# EAGLE board Amplifier (EAGLE 6.2)
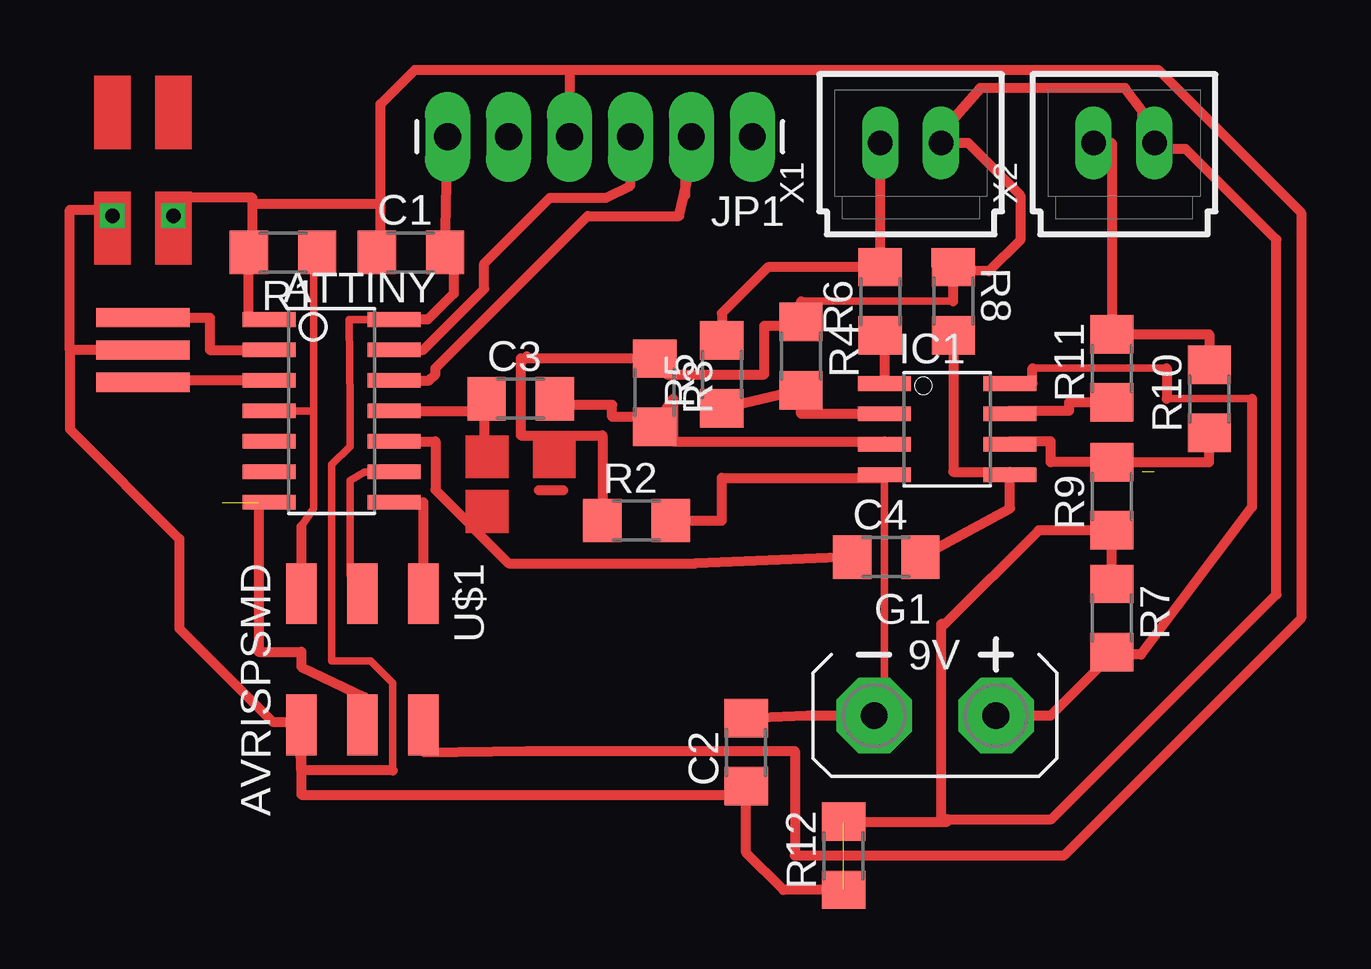
[diagram p0: board, top side]

No outline drawn. Coordinates in mm, seen from the top.
Copper layers (1*16): Top 0.035mm / dielectric 1.5mm / Bottom 0.035mm
Design rules: minimum track width 10mil, minimum drill 24mil, track to track 8mil, track to pad 8mil, pad to pad 8mil, via to via 8mil, smd to smd 8mil, copper to edge 40mil, drill to drill 8mil, minimum pad ring 10mil, minimum via ring 8mil, stop-mask expansion 4mil, vias tented up to drill 0mil, thermal gap 10mil

## Footprints (pad centres in the part's own frame; a part is rotated, then mirrored left to right if it is on the bottom)
SOIC14 = smd 0.61 x 2.21: 1 -3.81,-2.603; 2 -2.54,-2.603; 3 -1.27,-2.603; 4 0,-2.603; 5 1.27,-2.603; 6 2.54,-2.603; 7 3.81,-2.603; 8 3.81,2.603; 9 2.54,2.603; 10 1.27,2.603; 11 0,2.603; 12 -1.27,2.603; 13 -2.54,2.603; 14 -3.81,2.603
1206 = smd 1.6 x 1.803: 1 -1.422,0; 2 1.422,0
AB9V = drill 1.118 pad 3.15 octagon: + 0,2.54; - 0,-2.54
SO08 = smd 0.61 x 2.21: 1 -1.905,-2.616; 2 -0.635,-2.616; 3 0.635,-2.616; 4 1.905,-2.616; 5 1.905,2.616; 6 0.635,2.616; 7 -0.635,2.616; 8 -1.905,2.616
1X06_LONGPADS = drill 1.118 pad 1.88 long: 1 0,0; 2 2.54,0; 3 5.08,0; 4 7.62,0; 5 10.16,0; 6 12.7,0
EFOBM = smd 0.8 x 3.9: 1 -1.35,0; 2 0,0; 3 1.35,0
2X03SMD = smd 2.54 x 1.27: 1 -2.54,2.54; 2 2.92,2.54; 3 -2.54,0; 4 2.92,0; 5 -2.54,-2.54; 6 2.92,-2.54
70543-02 = drill 1.016 long: 1 -1.27,0; 2 1.27,0

## Placement (x,y rotation side)
ATTINY  ATTINY44-SSU  [SOIC14]  40.64,27.94 270 top
C1  [1206]  43.94,34.54 0 top
C2  220  [1206]  57.91,13.72 90 top
C3  .1uF  [1206]  48.51,28.45 0 top
C4  .1uF  [1206]  63.75,21.84 0 top
G1  AB9V  [AB9V]  65.79,15.24 270 top
IC1  OPA2132U  [SO08]  66.29,27.18 270 top
JP1  [1X06_LONGPADS]  58.17,39.37 180 top
QUARTZ  RESONATOR  [EFOBM]  32.77,30.48 90 top
R1  [1206]  38.61,34.54 180 top
R2  4.7K  [1206]  53.34,23.37 0 top
R3  100K  [1206]  54.1,28.7 270 top
R4  1K  [1206]  60.2,30.23 270 top
R5  10k  [1206]  56.9,29.46 90 top
R6  0  [1206]  63.5,32.51 90 top
R7  4.7K  [1206]  73.15,19.3 270 top
R8  100K  [1206]  66.55,32.51 270.1 top
R9  1K  [1206]  73.15,24.38 90 top
R10  10k  [1206]  77.22,28.45 90 top
R11  0  [1206]  73.15,29.72 90 top
R12  0  [1206]  61.98,9.4 90 top
U$1  AVRISPSMD  [2X03SMD]  41.91,17.78 270 top
X1  C-GRID-02-70543  [70543-02]  64.77,39.12 0 top
X2  C-GRID-02-70543  [70543-02]  73.66,39.12 0 top

## Library data of the parts
ATTINY QUARTZ U$1 = fab
C1-C4 = FAB_Hello
G1 = battery
IC1 = burr-brown; MF: TEXAS INSTRUMENTS; MPN: OPA2132U; OC_FARNELL: 1206934; OC_NEWARK: 80K6015
JP1 = SparkFun-Connectors
R1-R12 = ng
X1 X2 = con-molex; OC_FARNELL: unknown; OC_NEWARK: unknown

## Nets
9V+: G1.+ IC1.8 R7.2
9V-: C2.2 G1.- IC1.4 R2.2
+INA: C3.2 IC1.3 R3.2
+INB: C4.2 IC1.5 R8.2
-INA: IC1.2 R4.2 R5.1
-INB: IC1.6 R9.2 R10.1
AINL: ATTINY.10 C4.1
AINR: ATTINY.11
BUT: ATTINY.5
GND: ATTINY.14 C1.2 C2.1 JP1.6 QUARTZ.2 R2.1 R3.1 R4.1 R7.1 R8.1 R9.1 R12.1 R12.2 U$1.6 X1.2 X2.2
HEADA: R5.2 R6.2 X1.1
HEADB: R10.2 R11.2 X2.1
LED: ATTINY.6
MISO: ATTINY.8 U$1.1
MOSI: ATTINY.7 U$1.4
OUTA: IC1.1 R6.1
OUTB: IC1.7 R11.1
RST: ATTINY.4 R1.1 U$1.5
RX: ATTINY.12 JP1.2
SCK: ATTINY.9 U$1.3
TX: ATTINY.13 JP1.3
VCC: ATTINY.1 C1.1 JP1.4 R1.2 U$1.2
XTAL1: ATTINY.2 QUARTZ.3
XTAL2: ATTINY.3 QUARTZ.1

## Tracks (layer width: path | path; a pad name or v marks a point on that pad's centre or on a via)
9V+
  Top 0.305: 69.85,29.72 75.44,29.72 | 75.44,28.45 78.99,28.45
  Top 0.406: G1.+ 70.61,15.24 73.15,17.78 | 73.15,17.78 R7.2 73.15,17.78 | IC1.8 69.85,29.08 69.85,29.72 | 75.44,29.72 75.44,28.45 | 78.99,28.45 78.99,23.93 74.37,17.78 73.15,17.78
9V-
  Top 0.305: 63.68,14.73 IC1.4
  Top 0.406: R2.2 56.9,23.37 56.9,25.15 63.68,25.15 IC1.4 | 63.68,14.73 G1.- 60.45,15.24 C2.2
+INA
  Top 0.406: IC1.3 63.68,26.67 54.86,26.67 54.86,28.45 R3.2 54.1,27.69 52.32,27.69 52.32,28.19 49.94,28.19 C3.2
+INB
  Top 0.406: C4.2 68.91,23.88 IC1.5 68.91,25.4 66.55,25.4 R8.2
-INA
  Top 0.406: IC1.2 60.2,27.81 R4.2 R5.1
-INB
  Top 0.406: IC1.6 68.91,26.67 70.61,26.67 70.61,25.81 R9.2 77.22,25.81 R10.1
AINL
  Top 0.406: C4.1 55.81,21.59 48.02,21.59 44.96,24.65 44.96,26.67 ATTINY.10
GND  (1 unrouted)
  Top 0.305: ATTINY.14 41.36,31.75 41.4,28.19 41.4,26.46 40.64,25.7 40.64,17.53 42.26,17.53 43.18,16.61 43.18,12.95 | 60.2,32.51 66.55,32.51
  Top 0.406: JP1.6 C1.2 45.72,34.54 45.72,32.83 44.64,31.75 ATTINY.14 | U$1.6 39.37,12.95 | 39.37,12.95 39.31,14.99 | 39.31,14.99 38.17,14.99 34.29,18.86 34.29,22.61 29.72,27.18 29.72,30.48 | 43.18,12.95 39.37,12.95 | QUARTZ.2 29.72,30.48 | 39.31,14.99 39.37,14.99 | 29.72,30.48 29.72,36.32 31.75,36.32 | 48.77,30.12 R3.1 54.61,30.12 54.61,29.46 58.67,29.46 58.67,31.5 60.2,31.5 R4.1 60.2,32.51 | R2.1 51.92,26.92 48.51,26.92 48.51,30.12 48.77,30.12 | 66.55,32.51 R8.1 66.55,33.78 68.03,33.76 69.34,35.05 69.34,36.93 67.16,39.12 X1.2 66.04,39.52 67.67,41.4 73.7,41.4 74.42,40.43 74.42,39.12 X2.2 74.93,38.86 76.23,38.86 80.01,35.09 80.01,20.29 70.64,10.92 66.29,10.92 | R7.1 R9.1 70.1,22.96 66.19,19.05 66.04,19.05 66.04,10.92 66.29,10.92 | 48.77,30.12 48.77,30.23 | 39.37,12.95 39.37,11.94 57.91,11.94 C2.1 57.91,9.52 59.46,7.98 R12.1 | R12.2 66.29,10.82 66.29,10.92
HEADA
  Top 0.406: R5.2 56.9,32.01 58.82,33.93 R6.2 X1.1
HEADB
  Top 0.406: R10.2 77.22,31.14 R11.2 73.15,39.12 X2.1
MISO
  Top 0.406: ATTINY.8 44.45,24.13 U$1.1
MOSI  (1 unrouted)
  Top 0.406: ATTINY.7 37.59,24.13 37.59,17.9 39.37,17.9 39.37,17.27 42.03,16 41.95,14.73 41.91,14.01 U$1.4
N$1  (via drill 0.6)
  other vias: 34.04,36.07
N$2  (via drill 0.6)
  other vias: 31.5,36.07
N$3
  Top 0.406: 37.34,36.83 34.04,36.83
N$4  (1 unrouted)
N$5
  Top 0.406: 43.69,27.94 47.24,27.94
N$6
  Top 0.406: 47.24,28.19 46.99,28.19 46.99,25.91
N$7
  Top 0.406: 49.28,24.64 50.29,24.64
OUTA
  Top 0.406: R6.1 63.68,31.09 IC1.1
OUTB
  Top 0.406: R11.1 71.37,28.3 71.37,27.94 68.91,27.94 IC1.7
RST
  Top 0.305: 39.88,34.54 39.88,27.94 | 39.88,27.94 39.88,23.88 39.37,23.11 | ATTINY.4 39.88,27.94
  Top 0.406: R1.1 39.88,34.54 | 39.37,23.11 U$1.5
RX
  Top 0.406: ATTINY.12 44.7,29.21 44.96,29.46 44.96,29.72 48.51,33.27 51.31,36.07 55.12,36.07 55.29,36.85 | 55.29,36.85 55.63,38.35 | JP1.2 55.63,39.12 55.37,38.86 55.37,36.93 55.29,36.85
SCK
  Top 0.305: ATTINY.9 42.02,25.4 41.4,25.04 41.4,21.08 U$1.3
TX
  Top 0.406: ATTINY.13 44.45,30.48 46.99,33.02 46.99,34.08 49.74,36.83 52.07,36.83 53.09,37.34 JP1.3
VCC
  Top 0.406: ATTINY.1 37.19,31.75 R1.2 37.34,34.54 37.34,36.58 42.67,36.58 | U$1.2 44.45,14.73 44.5,13.72 48.77,13.76 59.94,13.76 59.94,9.4 71.15,9.4 81.05,19.3 81.05,36.2 75.08,42.16 50.55,42.16 | C1.1 42.67,34.54 42.67,36.58 | 42.67,36.58 42.67,40.73 44.11,42.16 50.55,42.16 | 50.55,42.16 JP1.4
XTAL1
  Top 0.406: QUARTZ.3 35.56,31.83 35.56,30.48 ATTINY.2
XTAL2
  Top 0.406: ATTINY.3 32.77,29.21 QUARTZ.1
(copper drawn outside any net)
  shapes: Top area x7